# EAGLE board MicromouseV0.0.4 (EAGLE 9.4.2)
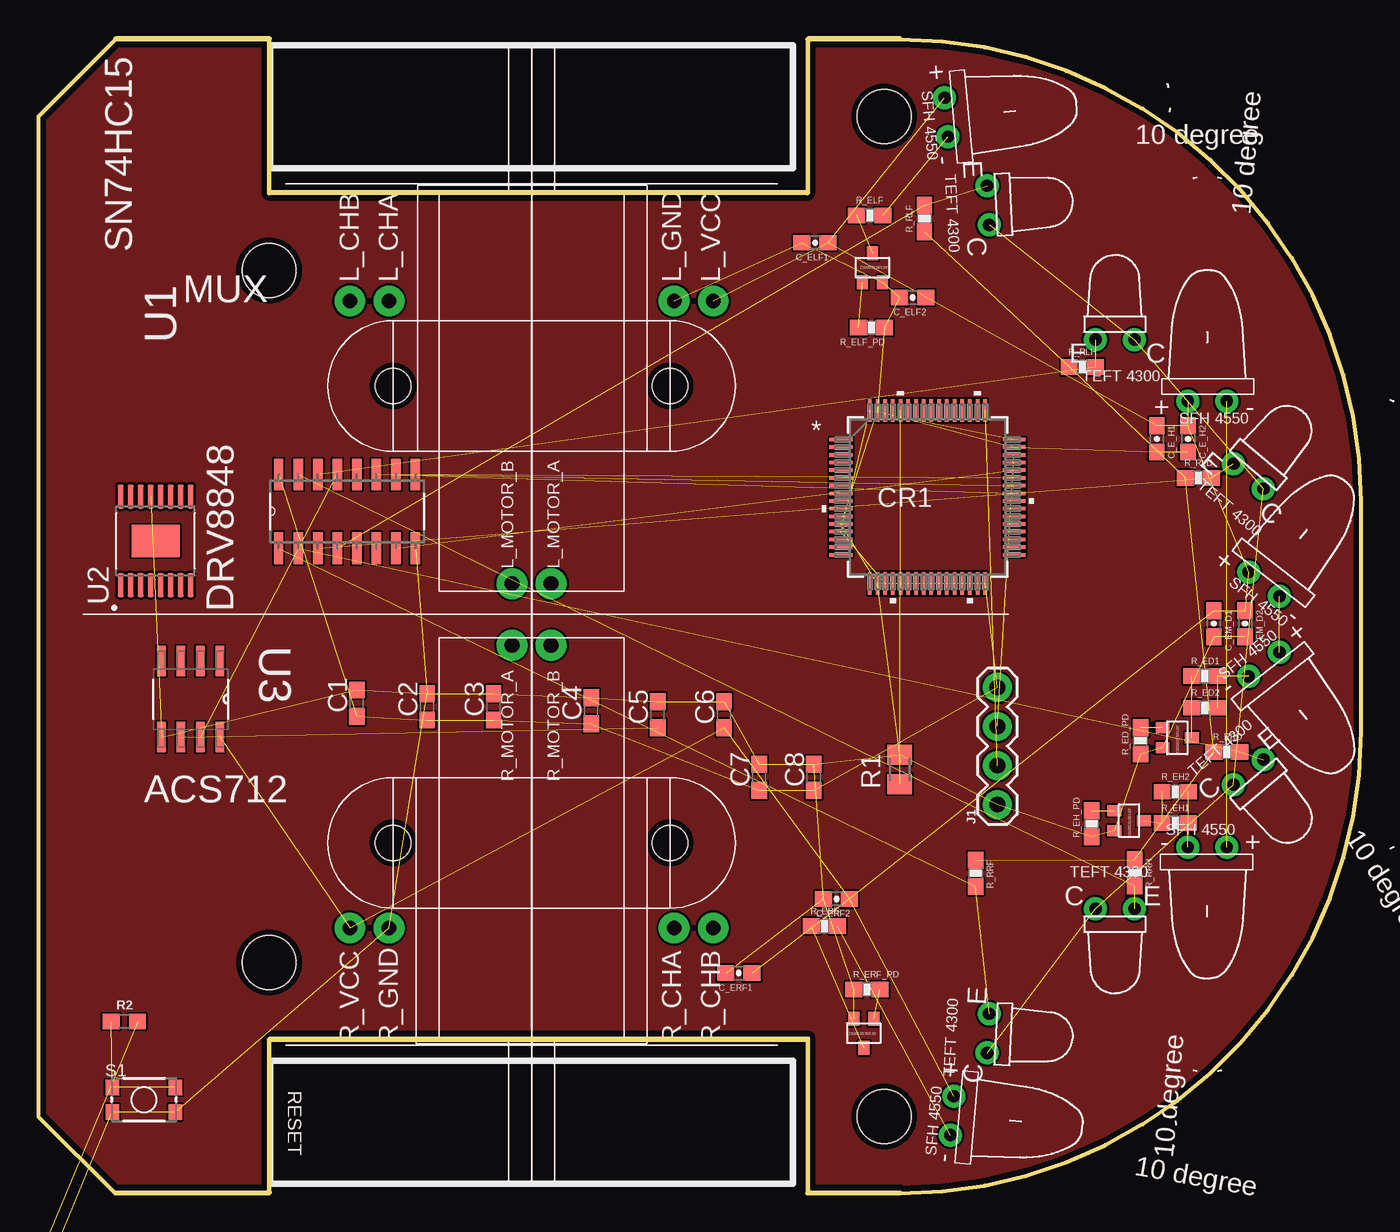
[diagram p0: board, top side]
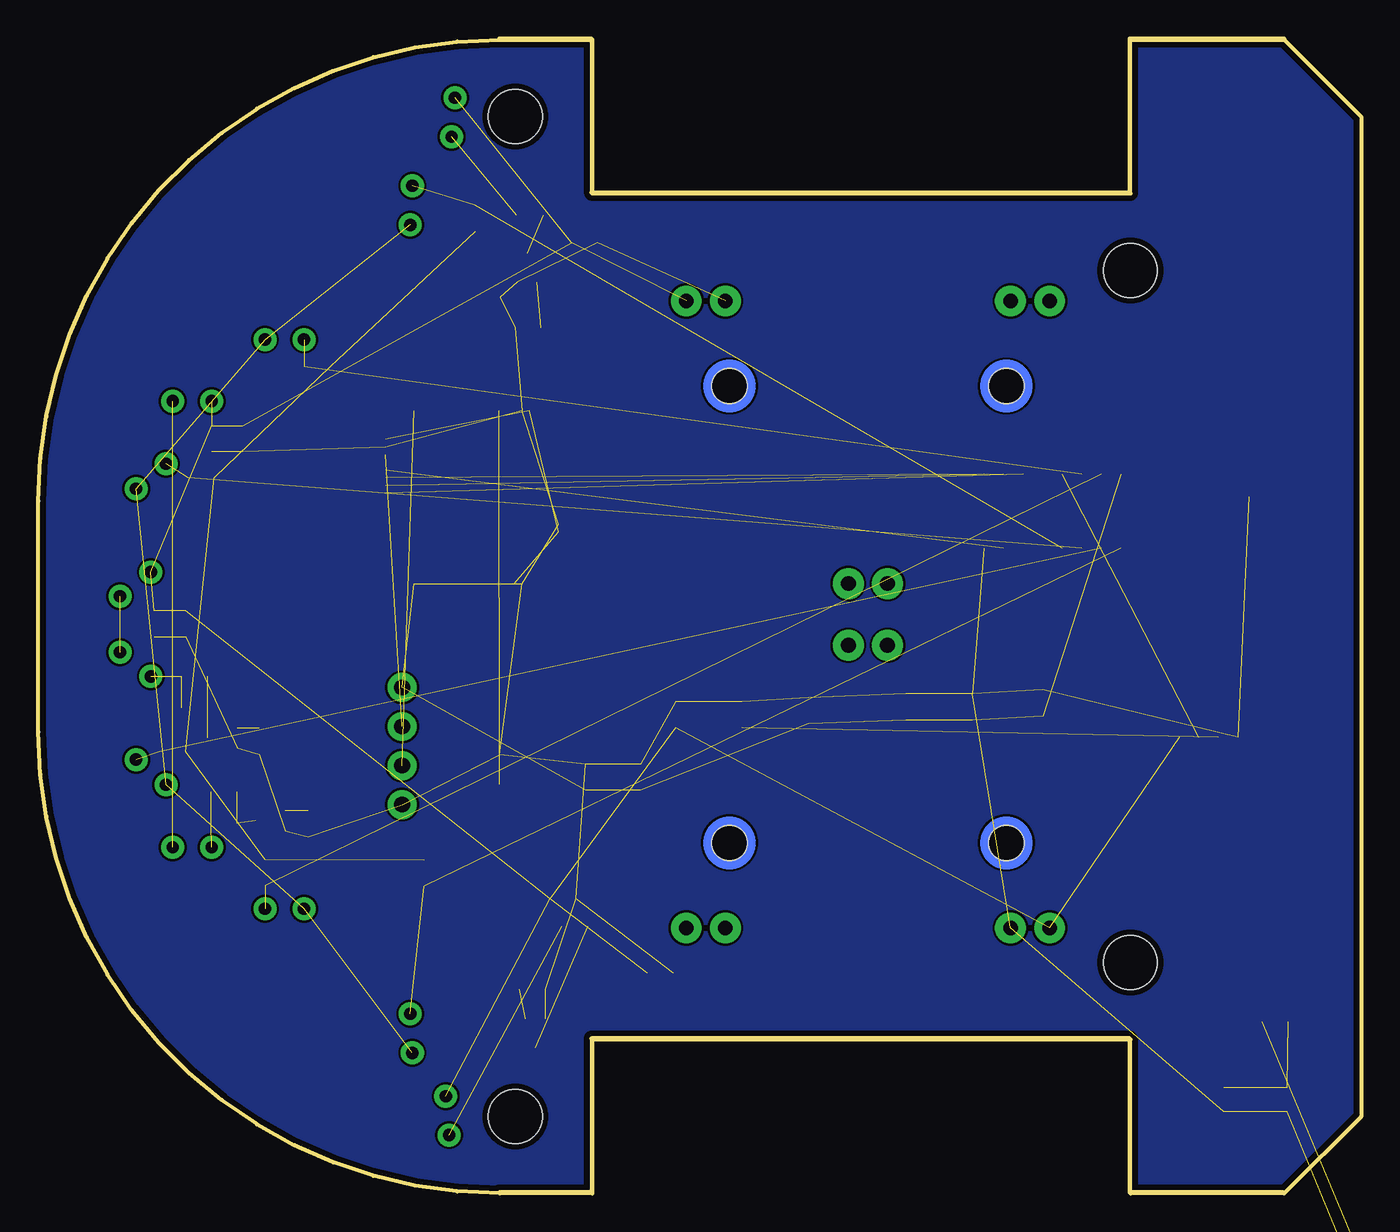
[diagram p1: board, bottom side, seen from below]

Size 86 x 75 mm. Coordinates in mm from the lower left corner, seen from the top.
Outline: 50,0 56,0 arc90 86,30 86,45 arc90 56,75 50,75 50,65 15,65 15,75 4.98,75 0,70 0,5 5,0 15,0 15,10 50,10 50,0
Copper layers (1*16): Top 0.0356mm / dielectric 1.5011mm / Bottom 0.0356mm
Design rules "LaenPCBOrder": minimum track width 6mil, minimum drill 13mil, track to track 6mil, track to pad 6mil, pad to pad 6mil, via to via 6mil, smd to smd 6mil, copper to edge 15mil, drill to drill 6mil, minimum pad ring 7mil, minimum via ring 7mil, stop-mask expansion 3mil, vias tented up to drill 0mil, thermal gap 10mil
Holes 3.5 mm at 15,15 55,70 15,60 55,5

## Footprints (pad centres in the part's own frame; a part is rotated, then mirrored left to right if it is on the bottom)
C0603 = smd 1.1 x 1: 1 -0.85,0; 2 0.85,0
0805 = smd 0.8 x 1.2: 1 -0.9,0; 2 0.9,0
0603 = smd 1.1 x 1: 1 -0.85,0; 2 0.85,0
0603-CAP = smd 1.1 x 1: 1 -0.85,0; 2 0.85,0
LQFP-64 = smd 1.473 x 0.229: 1 -5.626,3.75; 2 -5.626,3.25; 3 -5.626,2.75; 4 -5.626,2.25; 5 -5.626,1.75; 6 -5.626,1.25; 7 -5.626,0.75; 8 -5.626,0.25; 9 -5.626,-0.25; 10 -5.626,-0.75; 11 -5.626,-1.25; 12 -5.626,-1.75; 13 -5.626,-2.25; 14 -5.626,-2.75; 15 -5.626,-3.25; 16 -5.626,-3.75; 33 5.626,-3.75; 34 5.626,-3.25; 35 5.626,-2.75; 36 5.626,-2.25; 37 5.626,-1.75; 38 5.626,-1.25; 39 5.626,-0.75; 40 5.626,-0.25; 41 5.626,0.25; 42 5.626,0.75; 43 5.626,1.25; 44 5.626,1.75; 45 5.626,2.25; 46 5.626,2.75; 47 5.626,3.25; 48 5.626,3.75 | smd 0.229 x 1.473: 17 -3.75,-5.626; 18 -3.25,-5.626; 19 -2.75,-5.626; 20 -2.25,-5.626; 21 -1.75,-5.626; 22 -1.25,-5.626; 23 -0.75,-5.626; 24 -0.25,-5.626; 25 0.25,-5.626; 26 0.75,-5.626; 27 1.25,-5.626; 28 1.75,-5.626; 29 2.25,-5.626; 30 2.75,-5.626; 31 3.25,-5.626; 32 3.75,-5.626; 49 3.75,5.626; 50 3.25,5.626; 51 2.75,5.626; 52 2.25,5.626; 53 1.75,5.626; 54 1.25,5.626; 55 0.75,5.626; 56 0.25,5.626; 57 -0.25,5.626; 58 -0.75,5.626; 59 -1.25,5.626; 60 -1.75,5.626; 61 -2.25,5.626; 62 -2.75,5.626; 63 -3.25,5.626; 64 -3.75,5.626
LED-0603 = smd 1 x 1: A -0.877,0; C 0.877,0
SOD-323 = smd 0.63 x 0.83: A 1.15,0; C -1.15,0
1X04 = drill 1.016 pad 1.88: 1 0,0; 2 2.54,0; 3 5.08,0; 4 7.62,0
JST-2-PTH = drill 0.7 pad 1.6: 1 -1,0; 2 1,0
EMITTER = drill 0.8 pad 1.5: + -1.27,-0.5; - 1.27,-0.5
DMN3150LW = smd 0.7 x 0.9: D 0,0.95; G -0.65,-0.95; S 0.65,-0.95
SOT23-3@1 = smd 0.8 x 0.9: 1 -0.95,-1; 2 0.95,-1; 3 0,1.1
M0805 = smd 1.3 x 1.6: 1 -0.95,0; 2 0.95,0
1/6W-RES = drill 0.762: 1 -2.5,0; 2 2.5,0
0603-RES = smd 1.1 x 1: 1 -0.85,0; 2 0.85,0
RECEIVER = drill 0.8 pad 1.5: C 1.27,-0.5; E -1.27,-0.5
TACTILE_SWITCH_SMD_4.6X2.8MM = smd 0.9 x 1: 1 -2.05,-0.8; 2 2.05,-0.8; 3 2.05,0.8; 4 -2.05,0.8
PAD-JUMPER-2-NC_BY_TRACE_YES_SILK = smd 0.635 x 1.27: 1 -0.508,0; 2 0.508,0
SOIC127P600X175-16N = smd 2.057 x 0.61: 1 -4.801,8.89; 2 -4.801,7.62; 3 -4.801,6.35; 4 -4.801,5.08; 5 -4.801,3.81; 6 -4.801,2.54; 7 -4.801,1.27; 8 -4.801,0; 9 0,0; 10 0,1.27; 11 0,2.54; 12 0,3.81; 13 0,5.08; 14 0,6.35; 15 0,7.62; 16 0,8.89
SOP65P640X120-17N = smd 1.57 x 0.41: 1 -2.87,2.275; 2 -2.87,1.625; 3 -2.87,0.975; 4 -2.87,0.325; 5 -2.87,-0.325; 6 -2.87,-0.975; 7 -2.87,-1.625; 8 -2.87,-2.275; 9 2.87,-2.275; 10 2.87,-1.625; 11 2.87,-0.975; 12 2.87,-0.325; 13 2.87,0.325; 14 2.87,0.975; 15 2.87,1.625; 16 2.87,2.275 | smd 2.105 x 3.115: 17 0,0
SOIC127P600X175-8N = smd 1.981 x 0.559: 1 -2.464,1.905; 2 -2.464,0.635; 3 -2.464,-0.635; 4 -2.464,-1.905; 5 2.464,-1.905; 6 2.464,-0.635; 7 2.464,0.635; 8 2.464,1.905
SOT23-5 = smd 0.55 x 1.2: 1 -0.95,-1.3; 2 0,-1.3; 3 0.95,-1.3; 4 0.95,1.3; 5 -0.95,1.3
MY_MM_MOTOR_MOUNT = drill 0.95 pad 2: L_CHA -20.375,26.73; L_CHB -20.375,24.19; L_GND -20.375,45.27; L_MOTOR_A -2,37.27; L_MOTOR_B -2,34.73; L_VCC -20.375,47.81; R_CHA 20.375,45.27; R_CHB 20.375,47.81; R_GND 20.375,26.73; R_MOTOR_A 2,34.73; R_MOTOR_B 2,37.27; R_VCC 20.375,24.19 | hole 2.286: 14.85,45; 14.85,27; -14.85,27; -14.85,45

## Placement (x,y rotation side)
C1  .1uF  [C0603]  20.7,31.88 90 top
C2  .1uF  [C0603]  25.27,31.62 90 top
C3  .1uF  [C0603]  29.59,31.62 90 top
C4  .1uF  [C0603]  35.94,31.37 90 top
C5  1nF  [C0603]  40.26,31.11 90 top
C6  .1uF  [C0603]  44.58,31.11 90 top
C7  .1uF  [C0603]  46.86,27.05 90 top
C8  .1uF  [C0603]  50.42,27.05 90 top
C9  1.0uF  [0805]  -84.07,-232.16 0 top  (outside the outline)
C10  2.2uF  [0603]  -90.68,-235.97 0 top  (outside the outline)
C11  4.7uF  [0603]  -81.28,-250.44 0 top  (outside the outline)
C19  4.7uF  [0603]  -90.68,-254.76 0 top  (outside the outline)
C_E_H1  4.7uF  [0603-CAP]  72.72,49.05 270 top
C_E_H2  0.1uF  [0603-CAP]  74.75,49.05 270 top
C_ELF1  4.7uF  [0603-CAP]  50.5,61.8 180 top
C_ELF2  0.1uF  [0603-CAP]  56.85,58.24 180 top
C_EM_D1  4.7uF  [0603-CAP]  76.43,37.03 270 top
C_EM_D2  0.1uF  [0603-CAP]  78.46,37.03 270 top
C_ERF1  4.7uF  [0603-CAP]  45.54,14.33 180 top
C_ERF2  0.1uF  [0603-CAP]  51.89,19.15 180 top
CR1  STM32F103RET6  [LQFP-64]  57.81,45.26 0 top
D1  Yellow  [LED-0603]  -80.77,-254.51 0 top  (outside the outline)
D2  1A/23V/620mV  [SOD-323]  -87.38,-231.9 0 top  (outside the outline)
D3  RED  [LED-0603]  -90.68,-239.27 0 top  (outside the outline)
J1  [1X04]  62.36,25.27 90 top
JP2  LiPo  [JST-2-PTH]  -89.15,-246.89 0 top  (outside the outline)
LEFT_FRONT_EMITTER  EMITTER  [EMITTER]  59.52,70 275 top
NMOS1  DMN3150LW  [DMN3150LW]  54.23,60.17 0 top
NMOS2  DMN3150LW  [DMN3150LW]  74.04,29.62 270 top
NMOS3  DMN3150LW  [DMN3150LW]  53.67,10.41 180 top
NMOS4  DMN3150LW  [DMN3150LW]  70.92,24.23 270 top
Q1  2.5A/30V  [SOT23-3@1]  -90.68,-232.66 0 top  (outside the outline)
R1  1k  [M0805]  56.01,27.56 90 top
R2  10k  [0603]  5.59,11.18 0 top
R3  1K  [0603]  -87.38,-254.76 0 top  (outside the outline)
R4  1K  [0603]  -87.38,-235.97 0 top  (outside the outline)
R5  DNP  [1/6W-RES]  -89.15,-258.32 0 top  (outside the outline)
R6  2.0k  [0603]  -84.07,-254.76 0 top  (outside the outline)
R7  10k  [0603]  -84.07,-235.97 0 top  (outside the outline)
R_ED1  5.6  [0603-RES]  75.84,33.63 0 top
R_ED2  5.6  [0603-RES]  75.84,31.57 0 top
R_ED_PD  47k  [0603-RES]  71.65,29.41 90 top
R_EH1  5.6  [0603-RES]  73.91,24.08 0 top
R_EH2  5.6  [0603-RES]  73.91,26.11 0 top
R_EH_PD  47k  [0603-RES]  68.48,24.03 90 top
R_ELF  10  [0603-RES]  54.05,63.58 0 top
R_ELF_PD  47k  [0603-RES]  54.16,56.29 180 top
R_ERF  10  [0603-RES]  51.1,17.37 0 top
R_ERF_PD  47k  [0603-RES]  53.87,13.26 0 top
R_RLD  1.8k  [0603-RES]  75.41,46.51 0 top
R_RLF  1.8k  [0603-RES]  57.61,63.37 90 top
R_RLH  1.8k  [0603-RES]  67.87,53.72 0 top
R_RRD  1.8k  [0603-RES]  77.27,28.7 0 top
R_RRF  1.8k  [0603-RES]  60.93,20.8 270 top
R_RRH  1.8k  [0603-RES]  71.27,20.85 270 top
R_VM1  47k  [0603-RES]  -90.68,-260.86 0 top  (outside the outline)
R_VM2  10k  [0603-RES]  -90.68,-263.91 0 top  (outside the outline)
REC_LF  RECEIVER  [RECEIVER]  62.25,64.25 273 top
S1  RESET  [TACTILE_SWITCH_SMD_4.6X2.8MM]  6.86,6.1 0 top
SJ1  JUMPER-PAD-2-NC_BY_TRACE  [PAD-JUMPER-2-NC_BY_TRACE_YES_SILK]  -90.68,-250.7 0 top  (outside the outline)
SJ2  JUMPER-PAD-2-NC_BY_TRACE  [PAD-JUMPER-2-NC_BY_TRACE_YES_SILK]  -90.68,-228.09 0 top  (outside the outline)
U1  SN74HC151DR  [SOIC127P600X175-16N]  24.51,46.74 90 top
U2  DRV8848PWPR  [SOP65P640X120-17N]  7.62,42.42 90 top
U3  ACS712ELCTR-20A-T  [SOIC127P600X175-8N]  9.91,32.13 270 top
U4  AP2112K-3.3V  [SOT23-5]  -90.42,-224.03 0 top  (outside the outline)
U5  MCP73831  [SOT23-5]  -84.33,-243.59 0 top  (outside the outline)
U$7  RECEIVER  [RECEIVER]  79,47 320 top
U$8  RECEIVER  [RECEIVER]  79,27 220 top
U$9  RECEIVER  [RECEIVER]  62.25,10.38 267 top
U$11  EMITTER  [EMITTER]  80,40 322 top
U$12  MY_MM_MOTOR_MOUNT  [MY_MM_MOTOR_MOUNT]  -3.94,37.63 270 top
U$13  EMITTER  [EMITTER]  59.91,5.02 265 top
U$17  EMITTER  [EMITTER]  80,34 218 top
U$18  EMITTER  [EMITTER]  76,52 0 top
U$19  EMITTER  [EMITTER]  76,22 180 top
U$20  RECEIVER  [RECEIVER]  70,18 180 top
U$21  RECEIVER  [RECEIVER]  70,56 0 top

## Library data of the parts
C1-C8 = rcl; SPICEPREFIX: C
C9 = SparkFun-Capacitors; PROD_ID: CAP-11625
C10 = SparkFun-Capacitors; PROD_ID: CAP-07888
C11 C19 = SparkFun-Capacitors; PROD_ID: CAP-08280
C_E_H1 C_E_H2 C_ELF1 C_ELF2 C_EM_D1 C_EM_D2 C_ERF1 C_ERF2 LEFT_FRONT_EMITTER NMOS1-NMOS4 R_ED1 R_ED2 R_ED_PD R_EH1 R_EH2 R_EH_PD R_ELF R_ELF_PD R_ERF R_ERF_PD R_RLD R_RLF R_RLH R_RRD R_RRF R_RRH REC_LF U$7-U$9 U$11-U$13 U$17-U$21 = MicromouseV0.0.4
CR1 = MicromouseV0.0.4; MANUFACTURER_PART_NUMBER: STM32F103RET6; VENDOR: STMicroelectronics
D1 = SparkFun-LED; PROD_ID: DIO-09003
D2 = SparkFun-DiscreteSemi; PROD_ID: DIO-11623
D3 = SparkFun-LED; PROD_ID: DIO-00819
J1 = MicromouseV0.0.4; PROD_ID: CONN-09696
JP2 = SparkFun-Connectors; PROD_ID: CONN-09863; SKU: PRT-09914
Q1 = SparkFun-DiscreteSemi; PROD_ID: TRANS-11308
R1 = rcl; SPICEPREFIX: R
R2 R7 = SparkFun-Resistors; PROD_ID: RES-00824
R3 R4 = SparkFun-Resistors; PROD_ID: RES-07856
R5 R_VM1 R_VM2 SJ1 SJ2 = SparkFun-Passives
R6 = SparkFun-Resistors; PROD_ID: RES-08296
S1 = SparkFun-Electromechanical; PROD_ID: SWCH-13065
U1 = MicromouseV0.0.4; AVAILABILITY: Unavailable; DESCRIPTION: 8-Line To 1-Line Data Selectors/Multiplexers 16-SOIC -40 to 85; MF: Texas Instruments; MP: SN74HC151DR; PACKAGE: SOIC-16 Texas Instruments; PRICE: None
U2 = MicromouseV0.0.4; AVAILABILITY: Unavailable; DESCRIPTION: 2A Dual H-Bridge Motor Driver _PWM Control_ 16-HTSSOP -40 to 85; MF: Texas Instruments; MP: DRV8848PWPR; PACKAGE: HTSSOP-16 Texas Instruments; PRICE: None
U3 = MicromouseV0.0.4; AVAILABILITY: Unavailable; DESCRIPTION: Fully Integrated, Hall Effect-Based Linear Current Sensor IC with 2.1 kVRMS Voltage Isolation and a Low-Resistance Cu...; MF: Allegro; MP: ACS712ELCTR-20A-T; PACKAGE: SOIC-8 Allegro MicroSystems LLC; PRICE: None
U4 = SparkFun-PowerIC; PROD_ID: VREG-12457
U5 = SparkFun-PowerIC; PROD_ID: IC-09995

## Nets
3.3V: C10.1 R2.2 SJ2.2 U4.5
3V3: C1.1 C2.1 C3.1 C4.1 C7.1 C8.1 CR1.13 CR1.19 CR1.32 CR1.48 CR1.64 J1.4 U1.16
5V: C6.1 C_E_H1.1 C_E_H2.1 C_ELF1.1 C_ELF2.1 C_EM_D1.1 C_EM_D2.1 C_ERF1.1 C_ERF2.1 LEFT_FRONT_EMITTER.+ U3.8 U$11.+ U$12.L_VCC U$12.R_VCC U$13.+ U$18.+
A3.3V: REC_LF.C U$7.C U$8.C U$9.C U$20.C U$21.C
ADC_IN: CR1.11
AGND: R_RLD.1 R_RLF.1 R_RLH.1 R_RRD.1 R_RRF.1 R_RRH.1
BATTERY: R_VM1.2
CHIP_PU: R2.1 S1.3 S1.4
D2_EM: R_ED1.2 R_ED2.2 U$17.-
D_EM: U$11.- U$17.+
EM_D: NMOS2.G R_ED_PD.2
EM_H: NMOS4.G R_EH_PD.2
EM_RF: NMOS3.G R_ERF_PD.2
ENC_LA: U$12.L_CHA
ENC_LB: U$12.L_CHB
ENC_RA: U$12.R_CHA
ENC_RB: U$12.R_CHB
GND: C1.2 C2.2 C3.2 C4.2 C5.2 C6.2 C7.2 C8.2 C9.2 C10.2 C11.2 C19.2 C_E_H1.2 C_E_H2.2 C_ELF1.2 C_ELF2.2 C_EM_D1.2 C_EM_D2.2 C_ERF1.2 C_ERF2.2 CR1.12 CR1.18 CR1.31 CR1.47 CR1.63 D3.C J1.1 JP2.1 NMOS1.S NMOS2.S NMOS3.S NMOS4.S R1.2 R5.1 R6.1 R7.1 R_ED_PD.1 R_EH_PD.1 R_ELF_PD.1 R_ERF_PD.1 R_VM2.1 S1.1 S1.2 U1.8 U2.13 U3.5 U4.2 U5.2 U$12.L_GND U$12.R_GND
H2_EM: R_EH1.2 R_EH2.2 U$19.-
H_EM: U$18.- U$19.+
I2C_SCL: CR1.58
I2C_SDA: CR1.59
I_SENSE: U1.13 U3.7
LABEL_ME: NMOS1.G R_ELF_PD.2
LF_EM: LEFT_FRONT_EMITTER.- R_ELF.2
MLB: U$12.L_MOTOR_B
MLF: U$12.L_MOTOR_A
MRB: U$12.R_MOTOR_B
MRF: U$12.R_MOTOR_A
MUX_EN: CR1.44 U1.7
N$1: C5.1 U3.6
N$2: U1.5
N$5: NMOS3.D R_ERF.1
N$6: D3.A R4.2
N$7: NMOS1.D R_ELF.1
N$8: R4.1 SJ2.1
N$9: CR1.60 R1.1
N$10: D1.C U5.1
N$14: R5.2 SJ1.2 U5.5
N$16: R6.2 SJ1.1
N$17: D1.A R3.2
N$18: NMOS2.D R_ED1.1 R_ED2.1
N$19: NMOS4.D R_EH1.1 R_EH2.1
NRST: CR1.7
REC_LD: R_RLD.2 U1.3 U$7.E
REC_LF: R_RLF.2 REC_LF.E U1.4
REC_LH: R_RLH.2 U1.14 U$21.E
REC_RD: R_RRD.2 U1.2 U$8.E
REC_RF: R_RRF.2 U1.1 U$9.E
REC_RH: R_RRH.2 U1.15 U$20.E
RF_EM: R_ERF.2 U$13.-
SEL_A: CR1.41 U1.11
SEL_B: CR1.42 U1.10
SEL_C: CR1.43 U1.9
SPI_MISO: CR1.35
SPI_MOSI: CR1.36
SPI_NSS: CR1.33
SPI_SCK: CR1.34
SWCLK: CR1.49 J1.2
SWDIO: CR1.46 J1.3
V_BATT: C11.1 JP2.2 Q1.3 U5.3
V_USB: C19.1 D2.A Q1.1 R3.1 R7.2 U5.4
VBAT: CR1.1
VIN: C9.1 D2.C Q1.2 U4.1 U4.3
VOLTMETER: R_VM1.1 R_VM2.2

## Tracks (layer width: path | path; a pad name or v marks a point on that pad's centre or on a via)
3.3V  (3 unrouted)
3V3  (12 unrouted)
5V  (15 unrouted)
A3.3V  (5 unrouted)
AGND  (5 unrouted)
  pour Top (no thermals): 75.72,29.31 77.09,29.21 77.09,29.31
CHIP_PU  (2 unrouted)
D2_EM  (2 unrouted)
D_EM  (1 unrouted)
EM_D  (1 unrouted)
EM_H  (1 unrouted)
EM_RF  (1 unrouted)
GND  (49 unrouted)
H2_EM  (2 unrouted)
H_EM  (1 unrouted)
I_SENSE  (1 unrouted)
LABEL_ME  (1 unrouted)
LF_EM  (1 unrouted)
MUX_EN  (1 unrouted)
N$1  (1 unrouted)
N$3
  pour Bottom: 0,70 0,5 5,0 15,0 15,10 50,10 50,0 56,0 arc90 86,30 86,45 arc90 56,75 50,75 50,65 15,65 15,75 4.98,75
N$4
  pour Top: 0,70 0,5 5,0 15,0 15,10 50,10 50,0 56,0 arc90 86,30 86,45 arc90 56,75 50,75 50,65 15,65 15,75 4.98,75
N$5  (1 unrouted)
N$6  (1 unrouted)
N$7  (1 unrouted)
N$8  (1 unrouted)
N$9  (1 unrouted)
N$10  (1 unrouted)
N$14  (2 unrouted)
N$16  (1 unrouted)
N$17  (1 unrouted)
N$18  (2 unrouted)
N$19  (2 unrouted)
REC_LD  (2 unrouted)
REC_LF  (2 unrouted)
REC_LH  (2 unrouted)
REC_RD  (2 unrouted)
REC_RF  (2 unrouted)
REC_RH  (2 unrouted)
RF_EM  (1 unrouted)
SEL_A  (1 unrouted)
SEL_B  (1 unrouted)
SEL_C  (1 unrouted)
SWCLK  (1 unrouted)
SWDIO  (1 unrouted)
V_BATT  (3 unrouted)
V_USB  (5 unrouted)
VIN  (4 unrouted)
VOLTMETER  (1 unrouted)

## Text on the board
tPlace: SN74HC15 | MUX | DRV8848 | ACS712 | RESET
Document: Notes / ----------------------- / Bottom layer - GND / Add net classes / Add power planes / Use vector font